# Allegro board RING_COUNTER.brd
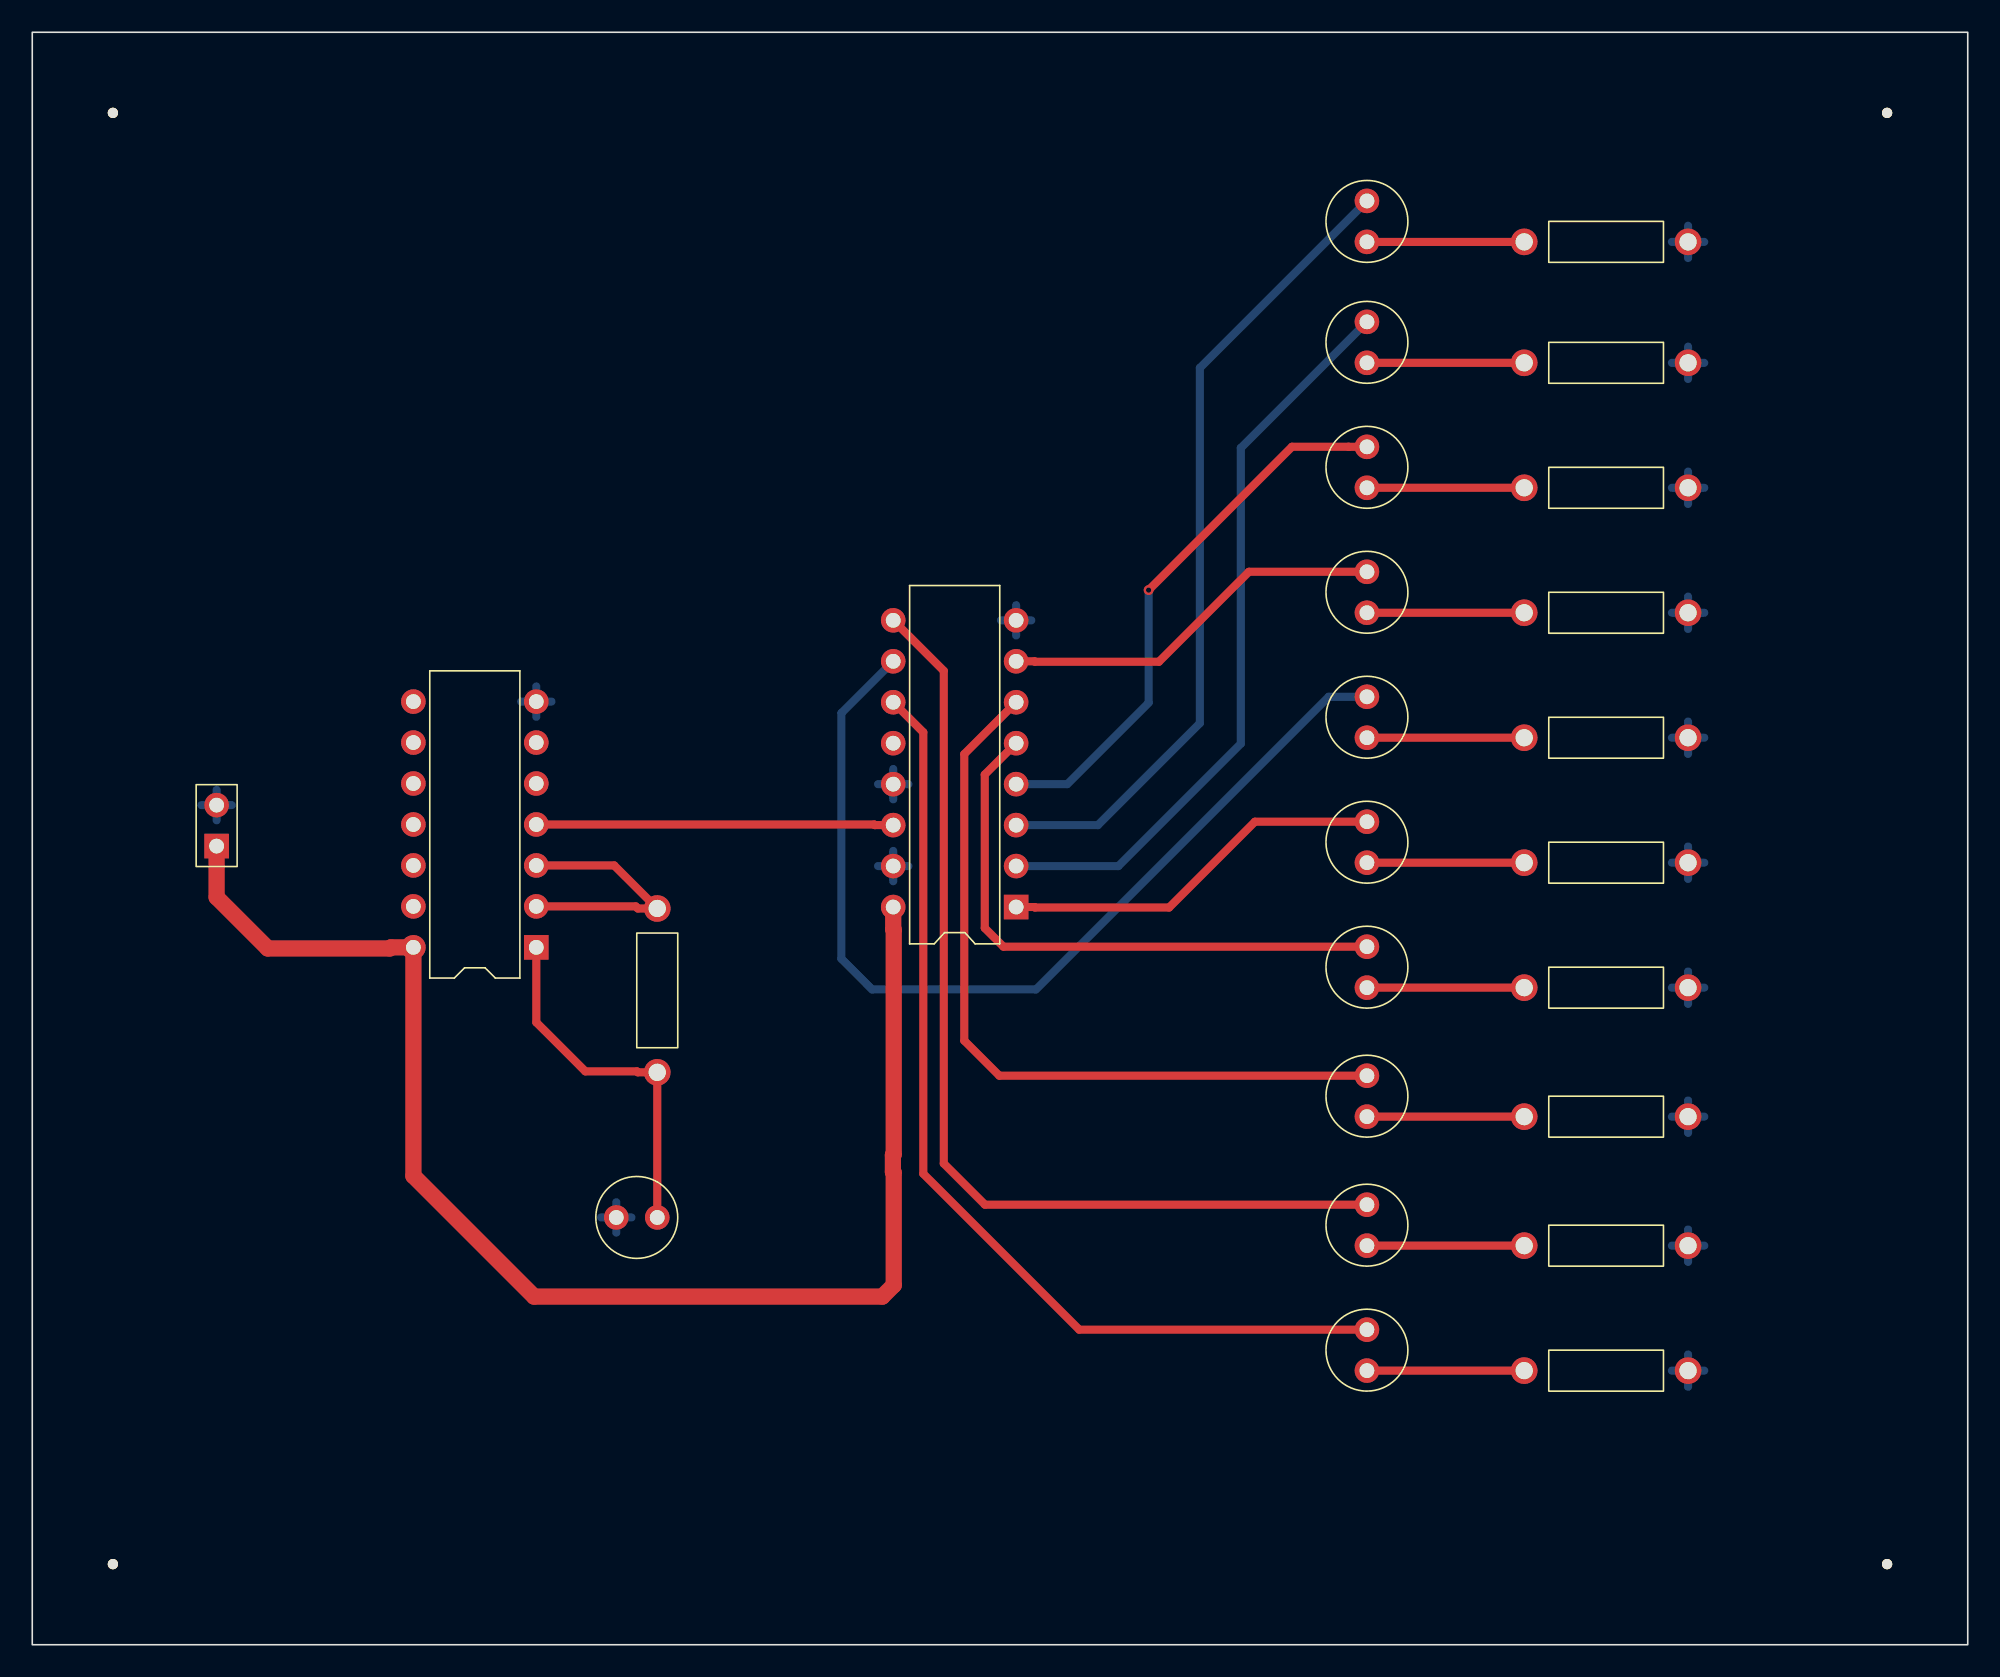
[diagram p0: board, top side]
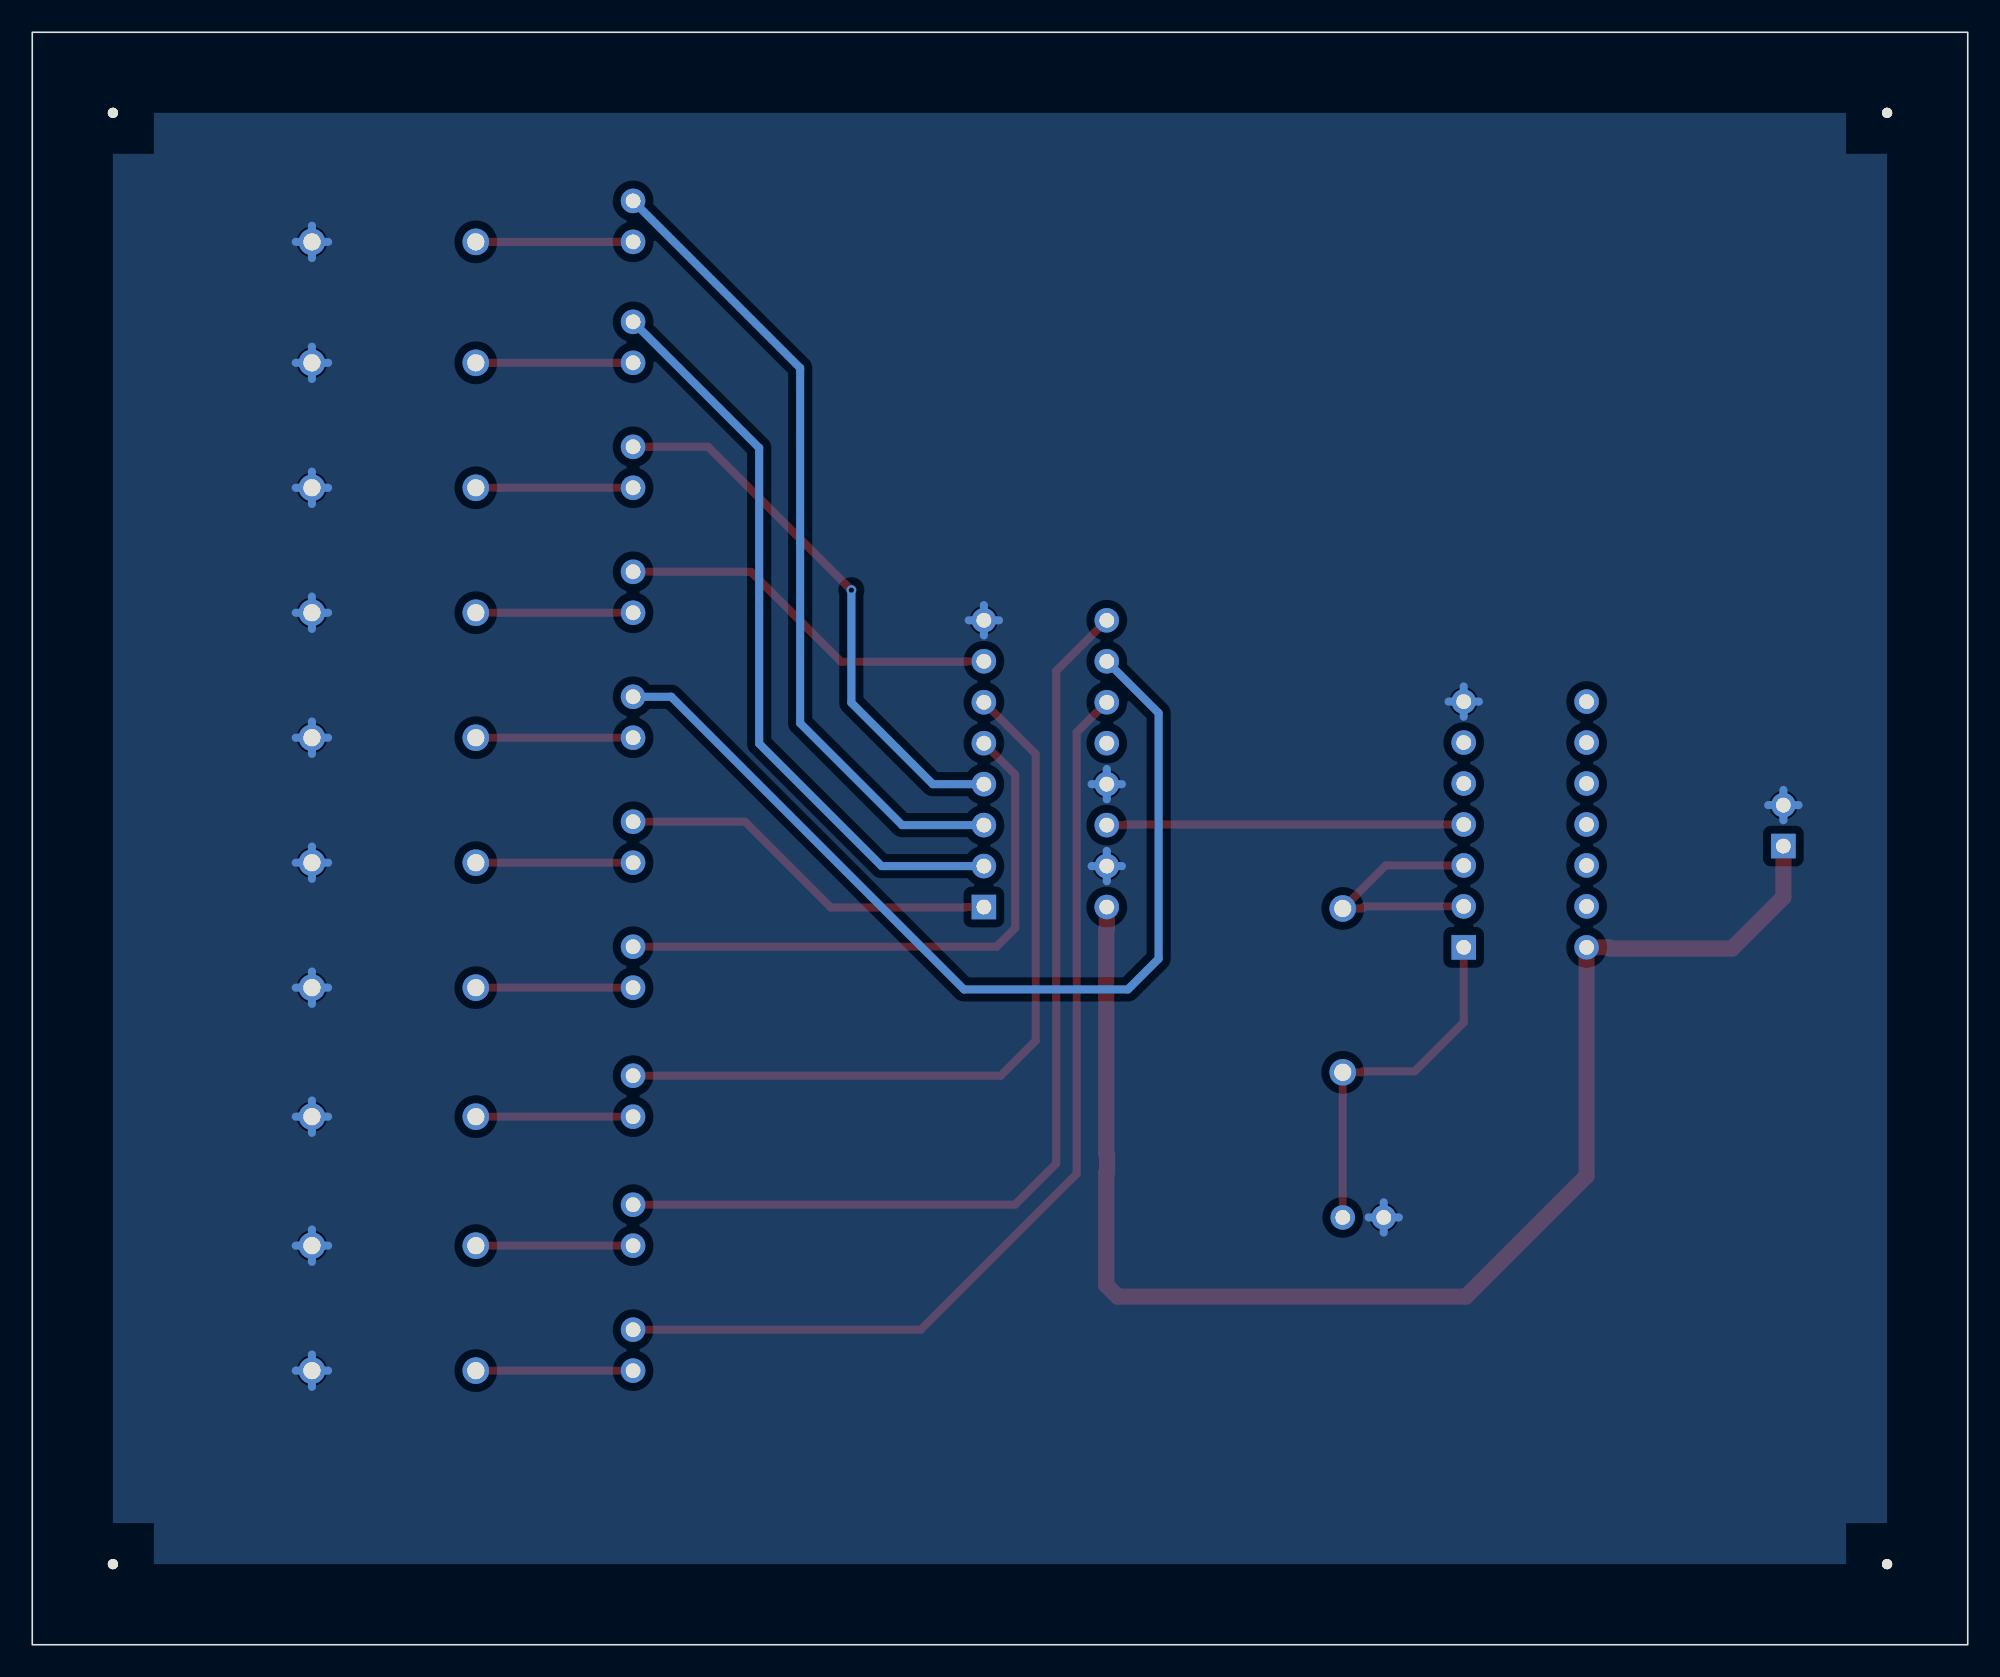
[diagram p1: board, bottom side, seen from below]

Outline 120 x 100 mm; copper layers: TOP, BOTTOM. Coordinates in mm from the lower left corner of the outline.
Outline path: rectangle 0,0 120,100

## Design rules (mm)
constraint set DEFAULT: min track width 0.5
nets with their own width: min track width 1; nets GND VCC

## Placement (name value [footprint] x y rotation side)
C1  10uF  [CAP196]  38.75 26.5 90 top
D1  LED  [CAP196]  82.75 87 0 top
D2  LED  [CAP196]  82.75 79.5 0 top
D3  LED  [CAP196]  82.75 71.75 0 top
D4  LED  [CAP196]  82.75 64 0 top
D5  LED  [CAP196]  82.75 56.25 0 top
D6  LED  [CAP196]  82.75 48.5 0 top
D7  LED  [CAP196]  82.75 40.75 0 top
D8  LED  [CAP196]  82.75 32.75 0 top
D9  LED  [CAP196]  82.75 24.75 0 top
D10  LED  [CAP196]  82.75 17 0 top
J1  CON2  [JUMPER2]  11.43 49.53 90 top
NOREF  -  [unnamed]  5 5 0 top
NOREF#2  -  [unnamed]  115 5 0 top
NOREF#3  -  [#2]  5 5 0 top
NOREF#4  -  [#2]  5 5 90 top
NOREF#5  -  [unnamed]  115 95 0 top
NOREF#6  -  [#2]  5 95 0 top
NOREF#7  -  [unnamed]  5 95 0 top
NOREF#8  -  [#2]  115 5 90 top
R1  500  [RES400]  92.5 87 270 top
R2  500  [RES400]  92.5 79.5 270 top
R3  200K  [RES400]  38.75 35.5 0 top
R4  500  [RES400]  92.5 71.75 270 top
R5  500  [RES400]  92.5 64 270 top
R6  500  [RES400]  92.5 56.25 270 top
R7  500  [RES400]  92.5 48.5 270 top
R8  500  [RES400]  92.5 40.75 270 top
R9  500  [RES400]  92.5 32.75 270 top
R10  500  [RES400]  92.5 24.75 270 top
R11  500  [RES400]  92.5 17 270 top
U1  7414  [DIP14_3]  31.25 43.25 180 top
U2  4017  [DIP16_3]  61 45.75 180 top

## Library data of the parts
C1 = CAP: Tolerance: ***; User Part Number: ***
D1-D10 = LED: Tolerance: ***; User Part Number: ***
J1 = CON2: User Part Number: ***
R1-R11 = R: Tolerance: ***; User Part Number: ***
U1 = 7414: Tolerance: ***; User Part Number: ***
U2 = 4017_0: Tolerance: ***; User Part Number: ***

## Footprints (pads in the part's own frame, mm; a bottom-side part is the same pattern mirrored in y, then rotated)
CAP196
  round 1.524 hole 0.914: 1(0,0) 2(0,2.54)
DIP14_3
  rect 1.524x1.524 hole 0.914: 1(0,0)
  round 1.524 hole 0.914: 2(0,-2.54) 3(0,-5.08) 4(0,-7.62) 5(0,-10.16) 6(0,-12.7) 7(0,-15.24) 8(7.62,-15.24) 9(7.62,-12.7) 10(7.62,-10.16) 11(7.62,-7.62) 12(7.62,-5.08) 13(7.62,-2.54) 14(7.62,0)
DIP16_3
  rect 1.524x1.524 hole 0.914: 1(0,0)
  round 1.524 hole 0.914: 2(0,-2.54) 3(0,-5.08) 4(0,-7.62) 5(0,-10.16) 6(0,-12.7) 7(0,-15.24) 8(0,-17.78) 9(7.62,-17.78) 10(7.62,-15.24) 11(7.62,-12.7) 12(7.62,-10.16) 13(7.62,-7.62) 14(7.62,-5.08) 15(7.62,-2.54) 16(7.62,0)
JUMPER2
  rect 1.524x1.524 hole 0.914: 1(0,0)
  round 1.524 hole 0.914: 2(2.54,0)
RES400
  round 1.651 hole 1.067: 1(0,0) 2(0,10.16)
unnamed
  round 0.635 hole 3.175 unplated: (0,0)

## Nets
GND: C1.2 J1.2 R1.2 R2.2 R4.2 R5.2 R6.2 R7.2 R8.2 R9.2 R10.2 R11.2 U1.7 U2.8 U2.13 U2.15
VCC: J1.1 U1.14 U2.16(VCC)
N01009: U1.4 U2.14
N01067: D1.2 U2.3
N01082: D2.2 U2.2
N01094: D3.2 U2.4
N01106: D4.2 U2.7
N01118: D10.2 U2.11
N01130: D9.2 U2.9
N01142: D8.2 U2.6
N01154: D7.2 U2.5
N01166: D6.2 U2.1
N01178: D5.2 U2.10
N01190: D1.1(CATHODE) R1.1
N01194: D2.1(CATHODE) R2.1
N01198: D3.1(CATHODE) R4.1
N01202: D4.1(CATHODE) R5.1
N01206: D5.1(CATHODE) R6.1
N01210: D6.1(CATHODE) R7.1
N01214: D7.1(CATHODE) R8.1
N01218: D8.1(CATHODE) R9.1
N01222: D9.1(CATHODE) R10.1
N01226: D10.1(CATHODE) R11.1
N02747: R3.2 U1.2 U1.3
N02900: C1.1 R3.1 U1.1

Pads without a net: U1 5 6 8 9 10 11 12 13; U2 12

## Via types
v1: diameter 0.61, hole 0.33, TOP to BOTTOM, 1 via

## Routing (per net, layer and track width the routed paths; a pad name or vN(x,y) marks a point on that pad's centre or on a via; arc(x,y) is an arc through that point)
GND: length 62.7
  BOTTOM w0.5: U1.7 32.19,58.49 ; U1.7 30.31,58.49 ; U1.7 31.25,59.43 ; U1.7 31.25,57.55 ; U2.13 53.38,54.31 ; U2.13 52.44,53.37 ; U2.13 53.38,52.43 ; U2.13 54.32,53.37 ; R10.2 102.66,25.75 ; R10.2 101.66,24.75 ; R10.2 102.66,23.75 ; R10.2 103.66,24.75 ; J1.2 12.37,52.07 ; J1.2 11.43,51.13 ; J1.2 11.43,53.01 ; J1.2 10.49,52.07 ; 102.66,39.75 R8.2 ; R8.2 102.66,41.75 ; R8.2 101.66,40.75 ; R8.2 103.66,40.75 ; R7.2 102.66,49.5 ; R7.2 102.66,47.5 ; R7.2 101.66,48.5 ; R7.2 103.66,48.5 ; R5.2 102.66,65 ; R5.2 103.66,64 ; R5.2 102.66,63 ; R5.2 101.66,64 ; 102.66,70.75 R4.2 ; R4.2 101.66,71.75 ; R4.2 103.66,71.75 ; R4.2 102.66,72.75 ; R6.2 103.66,56.25 ; R6.2 102.66,55.25 ; R6.2 102.66,57.25 ; R6.2 101.66,56.25 ; R1.2 102.66,88 ; R1.2 102.66,86 ; R1.2 103.66,87 ; R1.2 101.66,87 ; 61,62.59 U2.8 ; U2.8 60.06,63.53 ; U2.8 61,64.47 ; U2.8 61.94,63.53 ; R2.2 103.66,79.5 ; R2.2 102.66,80.5 ; R2.2 102.66,78.5 ; R2.2 101.66,79.5 ; 101.66,17 R11.2 ; R11.2 102.66,16 ; R11.2 102.66,18 ; R11.2 103.66,17 ; U2.15 53.38,49.23 ; U2.15 52.44,48.29 ; U2.15 53.38,47.35 ; U2.15 54.32,48.29 ; 102.66,31.75 R9.2 ; R9.2 103.66,32.75 ; R9.2 101.66,32.75 ; R9.2 102.66,33.75 ; 35.27,26.5 C1.2 ; C1.2 36.21,27.44 ; C1.2 37.15,26.5 ; C1.2 36.21,25.56
VCC: length 87.6
  TOP w1: J1.1 11.43,46.35 14.61,43.18 22.17,43.18 22.24,43.25 U1.14 23.63,29.07 31.11,21.59 52.7,21.59 53.41,22.3 53.41,29.27 53.36,29.33 53.36,30.36 53.41,30.41 53.41,44.33 53.38,44.36 U2.16
N01009: length 22.1
  TOP w0.5: U2.14 52.24,50.83 52.2,50.87 U1.4
N01067: length 50.7
  BOTTOM w0.5: D1.2 72.39,79.18 72.39,57.15 66.07,50.83 U2.3
N01082: length 46.5
  BOTTOM w0.5: U2.2 67.34,48.29 74.93,55.88 74.93,74.22 D2.2
N01094: length 34.5
  TOP w0.5: v1(69.22,65.41) 78.11,74.3 81.61,74.3 81.61,74.29 D3.2
  BOTTOM w0.5: v1(69.22,65.41) 69.22,58.42 64.17,53.37 U2.4
N01106: length 24.1
  TOP w0.5: D4.2 75.43,66.54 69.85,60.96 62.17,60.96 62.14,60.99 U2.7
N01118: length 61.5
  TOP w0.5: U2.11 55.24,56.59 55.24,29.21 64.92,19.54 D10.2
N01130: length 62.3
  TOP w0.5: U2.9 56.52,60.4 56.52,29.84 59.07,27.29 D9.2
N01142: length 48.2
  TOP w0.5: U2.6 57.78,55.23 57.78,37.47 59.96,35.29 D8.2
N01154: length 36.4
  TOP w0.5: D7.2 60.22,43.29 59.05,44.45 59.05,53.97 U2.5
N01166: length 24
  TOP w0.5: U2.1 62.14,45.75 62.17,45.72 70.48,45.72 75.81,51.04 D6.2
N01178: length 60.7
  BOTTOM w0.5: D5.2 80.38,58.79 62.23,40.64 52.07,40.64 50.16,42.55 50.16,57.77 U2.10
N01190: length 9.8
  TOP w0.5: D1.1 R1.1
N01194: length 9.8
  TOP w0.5: D2.1 R2.1
N01198: length 9.8
  TOP w0.5: D3.1 R4.1
N01202: length 9.8
  TOP w0.5: D4.1 R5.1
N01206: length 9.8
  TOP w0.5: D5.1 R6.1
N01210: length 9.8
  TOP w0.5: D6.1 R7.1
N01214: length 9.8
  TOP w0.5: D7.1 R8.1
N01218: length 9.8
  TOP w0.5: D8.1 R9.1
N01222: length 9.8
  TOP w0.5: D9.1 R10.1
N01226: length 9.8
  TOP w0.5: D10.1 R11.1
N02747: length 16.2
  TOP w0.5: U1.2 37.42,45.79 37.55,45.66 R3.2 36.08,48.33 U1.3
N02900: length 22.4
  TOP w0.5: C1.1 R3.1 37.55,35.5 37.49,35.56 34.29,35.56 31.25,38.6 U1.1

## Copper pours and planes (outline as drawn; the poured copper is in the pictures)
GND on BOTTOM: 5,5 5,95 115,95 115,5

## Text on the board
COMPVAL_TYPE_TOP: FIGURE | FINISHED_SIZE | 0.3302 | 0.9144 | 1.0668 | 3.175 | DRILL CHART: TOP to BOTTOM | ALL UNITS ARE IN MILLIMETERS | PLATED | NON-PLATED | QTY | 1 | 54 | 22 | 4
